# EAGLE board dilnew (EAGLE 9.6.2)
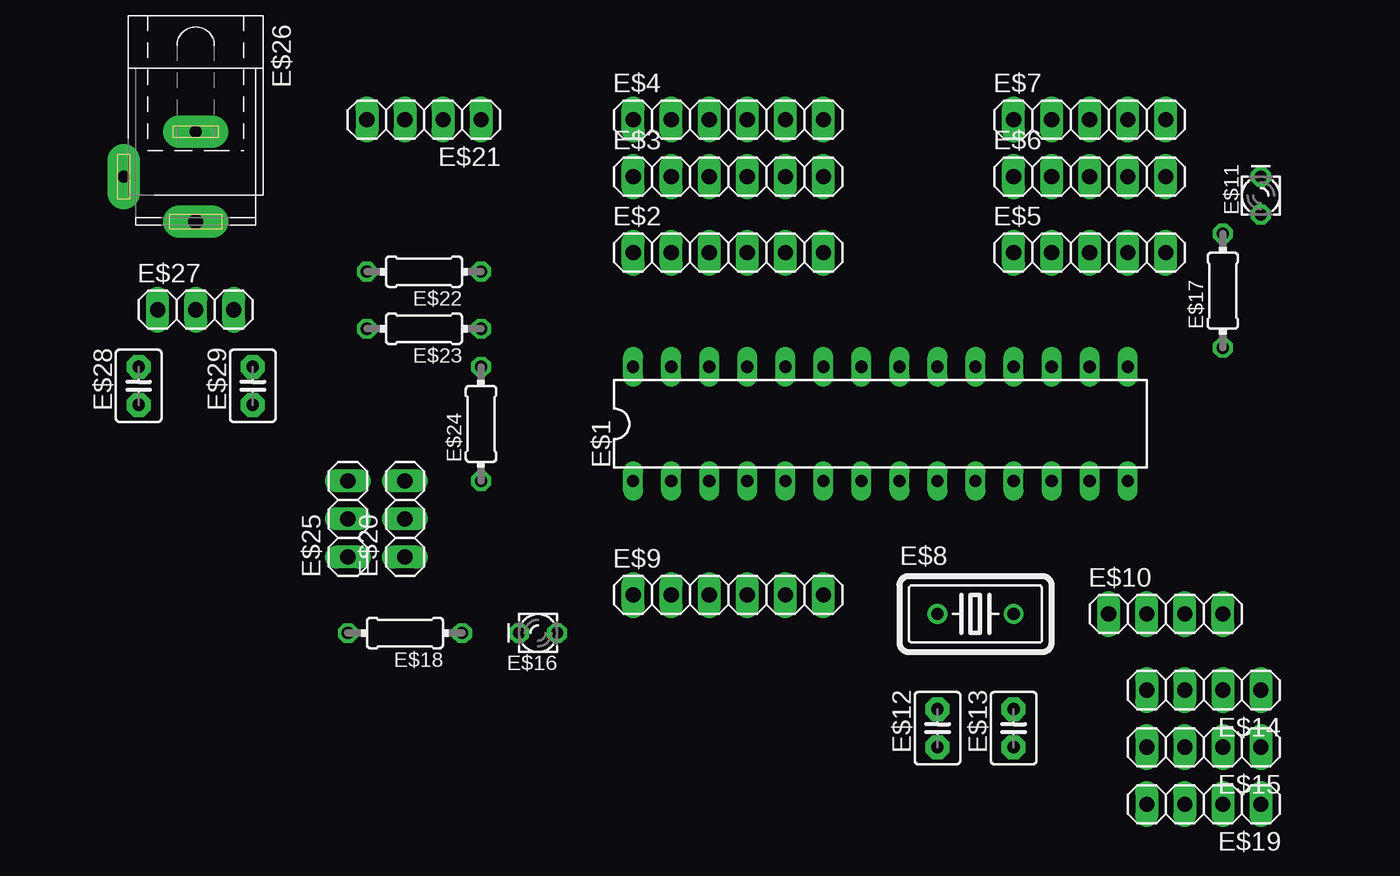
[diagram p0: board, top side]
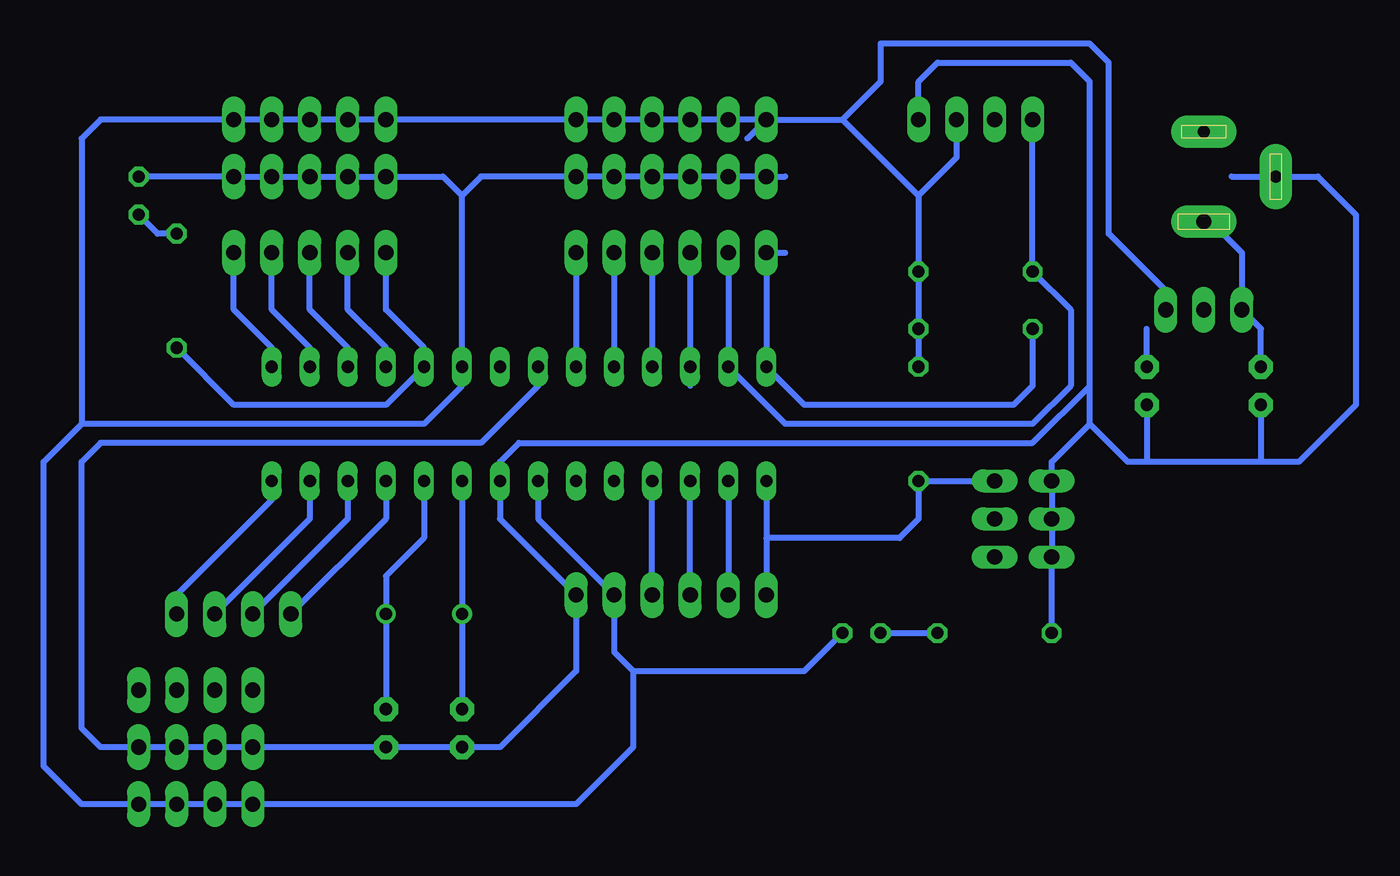
[diagram p1: board, bottom side, seen from below]

No outline drawn. Coordinates in mm, seen from the top.
Copper layers (1*16): Top 0.035mm / dielectric 1.5mm / Bottom 0.035mm
Design rules "default": minimum track width 10mil, minimum drill 24mil, track to track 8mil, track to pad 8mil, pad to pad 8mil, via to via 8mil, smd to smd 8mil, copper to edge 40mil, drill to drill 8mil, minimum pad ring 10mil, minimum via ring 8mil, stop-mask expansion 4mil, vias tented up to drill 0mil, thermal gap 10mil

## Footprints (pad centres in the part's own frame; a part is rotated, then mirrored left to right if it is on the bottom)
DIL28-3 = drill 0.813 long: 1 -16.51,-3.81; 2 -13.97,-3.81; 3 -11.43,-3.81; 4 -8.89,-3.81; 5 -6.35,-3.81; 6 -3.81,-3.81; 7 -1.27,-3.81; 8 1.27,-3.81; 9 3.81,-3.81; 10 6.35,-3.81; 11 8.89,-3.81; 12 11.43,-3.81; 13 13.97,-3.81; 14 16.51,-3.81; 15 16.51,3.81; 16 13.97,3.81; 17 11.43,3.81; 18 8.89,3.81; 19 6.35,3.81; 20 3.81,3.81; 21 1.27,3.81; 22 -1.27,3.81; 23 -3.81,3.81; 24 -6.35,3.81; 25 -8.89,3.81; 26 -11.43,3.81; 27 -13.97,3.81; 28 -16.51,3.81
1X06 = drill 1.016 long: 1 -6.35,0; 2 -3.81,0; 3 -1.27,0; 4 1.27,0; 5 3.81,0; 6 6.35,0
1X05 = drill 1.016 long: 1 -5.08,0; 2 -2.54,0; 3 0,0; 4 2.54,0; 5 5.08,0
HC18U-V = drill 0.813: 1 -2.54,0; 2 2.54,0
1X04 = drill 1.016 long: 1 -3.81,0; 2 -1.27,0; 3 1.27,0; 4 3.81,0
LD260 = drill 0.813 octagon: A -1.27,0; K 1.27,0
C2.5-3 = drill 0.813 pad 1.6 octagon: 1 -1.27,0; 2 1.27,0
0204/7 = drill 0.813 octagon: 1 -3.81,0; 2 3.81,0
1X03 = drill 1.016 long: 1 -2.54,0; 2 0,0; 3 2.54,0
SPC4078 = drill 0.8 pad 2.184 long: 1 -3,0; 2 0,-4.8 | drill 1 pad 2.184 long: 3 3,0

## Placement (x,y rotation side)
E$1  [DIL28-3]  52.07,50.8 0 top
E$2  [1X06]  41.91,62.23 0 top
E$3  [1X06]  41.91,67.31 0 top
E$4  [1X06]  41.91,71.12 0 top
E$5  [1X05]  66.04,62.23 0 top
E$6  [1X05]  66.04,67.31 0 top
E$7  [1X05]  66.04,71.12 0 top
E$8  [HC18U-V]  58.42,38.1 0 top
E$9  [1X06]  41.91,39.37 0 top
E$10  [1X04]  71.12,38.1 0 top
E$11  [LD260]  77.47,66.04 90 top
E$12  [C2.5-3]  55.88,30.48 90 top
E$13  [C2.5-3]  60.96,30.48 90 top
E$14  [1X04]  73.66,33.02 180 top
E$15  [1X04]  73.66,29.21 180 top
E$16  [LD260]  29.21,36.83 180 top
E$17  [0204/7]  74.93,59.69 90 top
E$18  [0204/7]  20.32,36.83 180 top
E$19  [1X04]  73.66,25.4 180 top
E$20  [1X03]  20.32,44.45 90 top
E$21  [1X04]  21.59,71.12 180 top
E$22  [0204/7]  21.59,60.96 180 top
E$23  [0204/7]  21.59,57.15 180 top
E$24  [0204/7]  25.4,50.8 90 top
E$25  [1X03]  16.51,44.45 90 top
E$26  [SPC4078]  6.35,67.31 270 top
E$27  [1X03]  6.35,58.42 0 top
E$28  [C2.5-3]  2.54,53.34 90 top
E$29  [C2.5-3]  10.16,53.34 90 top

## Library data of the parts
E$1 = 40xx
E$2-E$7 E$9 E$10 E$14 E$15 E$19-E$21 E$25 E$27 = pinhead
E$8 = crystal
E$11 E$16 = led
E$12 E$13 E$28 E$29 = capacitor-wima
E$17 E$18 E$22-E$24 = resistor
E$26 = con-jack

## Nets
S$1: E$1.8 E$1.22 E$9.6 E$12.1 E$13.1 E$15.1 E$15.4 E$18.2 E$21.1 E$25.1 E$25.3 E$28.1 E$29.1
S$2: E$11.A E$17.2
S$3: E$1.26 E$2.3
S$4: E$1.25 E$2.4
S$5: E$1.24 E$2.5
S$6: E$1.23 E$2.6
S$8: E$1.2 E$9.2
S$9: E$1.18 E$5.2
S$10: E$1.19 E$5.1 E$17.1
S$11: E$1.17 E$5.3
S$12: E$1.16 E$5.4
S$13: E$1.15 E$5.5
S$14: E$1.3 E$9.3
S$15: E$1.4 E$9.4
S$16: E$1.9 E$8.1 E$12.2
S$17: E$1.10 E$8.2 E$13.2
S$18: E$1.1 E$9.1 E$20.3 E$24.1
S$19: E$27.1 E$28.2
S$20: E$16.K E$18.1
S$21: E$1.13 E$10.3
S$22: E$29.2
S$24: E$1.11 E$10.1
S$25: E$1.7 E$1.20 E$4.1 E$4.6 E$7.5 E$9.5 E$16.A E$19.1 E$19.4 E$21.2 E$24.2 E$27.3
S$27: E$1.12 E$10.2
S$29: E$3.1 E$3.6 E$6.5 E$11.K
S$32: E$1.27 E$2.2 E$21.4 E$22.2
S$34: E$1.14 E$10.4
S$35: E$1.28 E$2.1 E$23.2

## Tracks (layer width: path | path; a pad name or v marks a point on that pad's centre or on a via)
S$1
  Bottom 0.406: 4.5,67.31 -1.27,67.31 -3.81,64.77 -3.81,52.07 0,48.26 2.54,48.26 | 10.16,48.26 11.43,48.26 13.97,50.8 | E$29.1 10.16,48.26 | 2.54,48.26 10.16,48.26 | E$28.1 2.54,48.26 | 13.97,50.8 16.51,48.26 E$25.3 E$25.1 E$18.2 | E$21.1 25.4,73.66 24.13,74.93 15.24,74.93 13.97,73.66 13.97,53.34 | 13.97,50.8 13.97,53.34 | 13.97,53.34 17.78,49.53 52.07,49.53 53.34,48.26 E$1.8 53.34,44.45 E$9.6 48.26,34.29 53.34,29.21 E$12.1 E$13.1 E$15.4 E$15.1 80.01,29.21 81.28,30.48 81.28,48.26 80.01,49.53 54.61,49.53 50.8,53.34 E$1.22
S$2
  Bottom 0.406: E$17.2 76.2,63.5 E$11.A
S$3
  Bottom 0.406: E$2.3 E$1.26 40.64,53.34
S$4
  Bottom 0.406: E$2.4 E$1.25
S$5
  Bottom 0.406: E$2.5 E$1.24
S$6
  Bottom 0.406: E$2.6 E$1.23
S$8
  Bottom 0.406: E$1.2 E$9.2
S$9
  Bottom 0.406: E$5.2 63.5,58.42 60.96,55.88 E$1.18
S$10
  Bottom 0.406: 60.96,60.96 E$5.1 | E$5.1 60.96,58.42 58.42,55.88 E$1.19 60.96,52.07 71.12,52.07 E$17.1 | E$5.1 60.96,63.5
S$11
  Bottom 0.406: E$1.17 63.5,55.88 66.04,58.42 E$5.3
S$12
  Bottom 0.406: E$1.16 66.04,55.88 68.58,58.42 E$5.4
S$13
  Bottom 0.406: E$1.15 68.58,55.88 71.12,58.42 E$5.5
S$14
  Bottom 0.406: E$9.3 E$1.3
S$15
  Bottom 0.406: E$9.4 E$1.4
S$16
  Bottom 0.406: E$1.9 E$8.1 E$12.2
S$17
  Bottom 0.406: 58.42,45.72 E$1.10 58.42,43.18 60.96,40.64 E$8.2 E$13.2
S$18
  Bottom 0.406: E$20.3 E$24.1 25.4,44.45 26.67,43.18 35.56,43.18 | E$1.1 35.56,43.18 | 35.56,43.18 E$9.1
S$19
  Bottom 0.406: 5.08,64.77 6.35,64.77 3.81,62.23 E$27.1 2.54,57.15 E$28.2
S$20
  Bottom 0.406: E$16.K E$18.1
S$21
  Bottom 0.406: 66.04,45.72 E$1.13 66.04,44.45 E$10.3
S$22
  Bottom 0.406: E$29.2 10.16,57.15
S$24
  Bottom 0.406: E$1.11 60.96,44.45 E$10.1
S$25
  Bottom 0.406: E$27.3 8.89,59.69 12.7,63.5 12.7,74.93 13.97,76.2 27.94,76.2 27.94,73.66 30.48,71.12 | 36.83,69.85 E$4.1 | E$21.2 22.86,68.58 25.4,66.04 | E$4.1 30.48,71.12 | 30.48,71.12 25.4,66.04 | 25.4,66.04 E$24.2 | E$1.7 50.8,44.45 E$9.5 45.72,35.56 44.45,34.29 | 44.45,34.29 33.02,34.29 E$16.A | 44.45,34.29 44.45,29.21 48.26,25.4 E$19.4 E$19.1 81.28,25.4 83.82,27.94 83.82,48.26 81.28,50.8 | E$1.20 55.88,53.34 58.42,50.8 81.28,50.8 | 81.28,50.8 81.28,69.85 80.01,71.12 E$7.5 E$4.6 E$4.1
S$27
  Bottom 0.406: E$1.12 63.5,44.45 E$10.2
S$29
  Bottom 0.406: 34.29,67.31 E$3.1 E$3.6 54.61,67.31 55.88,66.04 | 55.88,55.88 55.88,66.04 | E$11.K E$6.5 57.15,67.31 55.88,66.04
S$32
  Bottom 0.406: E$21.4 E$22.2 15.24,58.42 15.24,53.34 17.78,50.8 34.29,50.8 E$1.27 E$2.2 38.1,63.5
S$34
  Bottom 0.406: E$1.14 68.58,45.72 74.93,39.37 E$10.4
S$35
  Bottom 0.406: E$23.2 17.78,53.34 19.05,52.07 33.02,52.07 E$1.28 E$2.1 34.29,62.23